# Altium PCB EVB_PHY_SR8201F_V1.0.0.PcbDoc (part 1 of 2)
Units mil, origin at the board's own origin, x right, y up, seen from the top; angles counter-clockwise.
Board outline 6000 x 4000 mil, 4 copper layers (Top, L2, L3, Bottom), stack 35.4 mil thick; 66 components, 60 nets, 233 pads, 178 vias.
Unrouted connection lines stored in the file: 129.
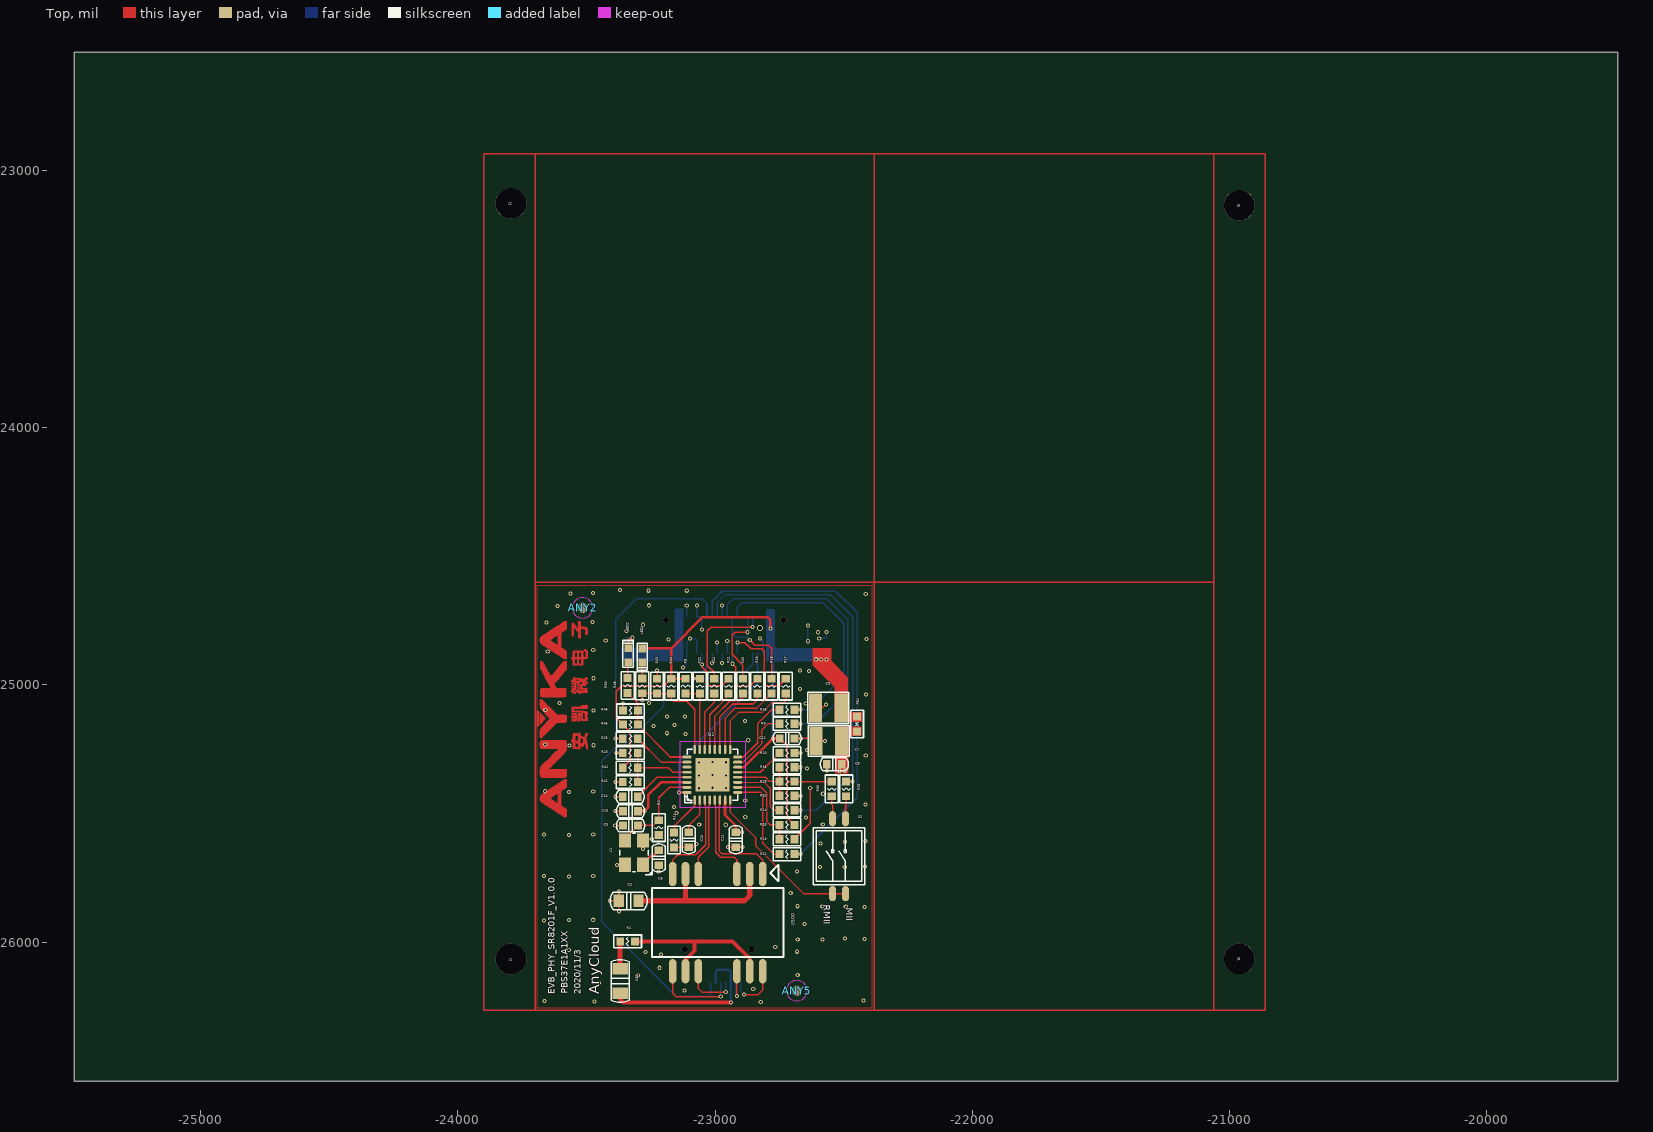
[diagram p0: Top view]
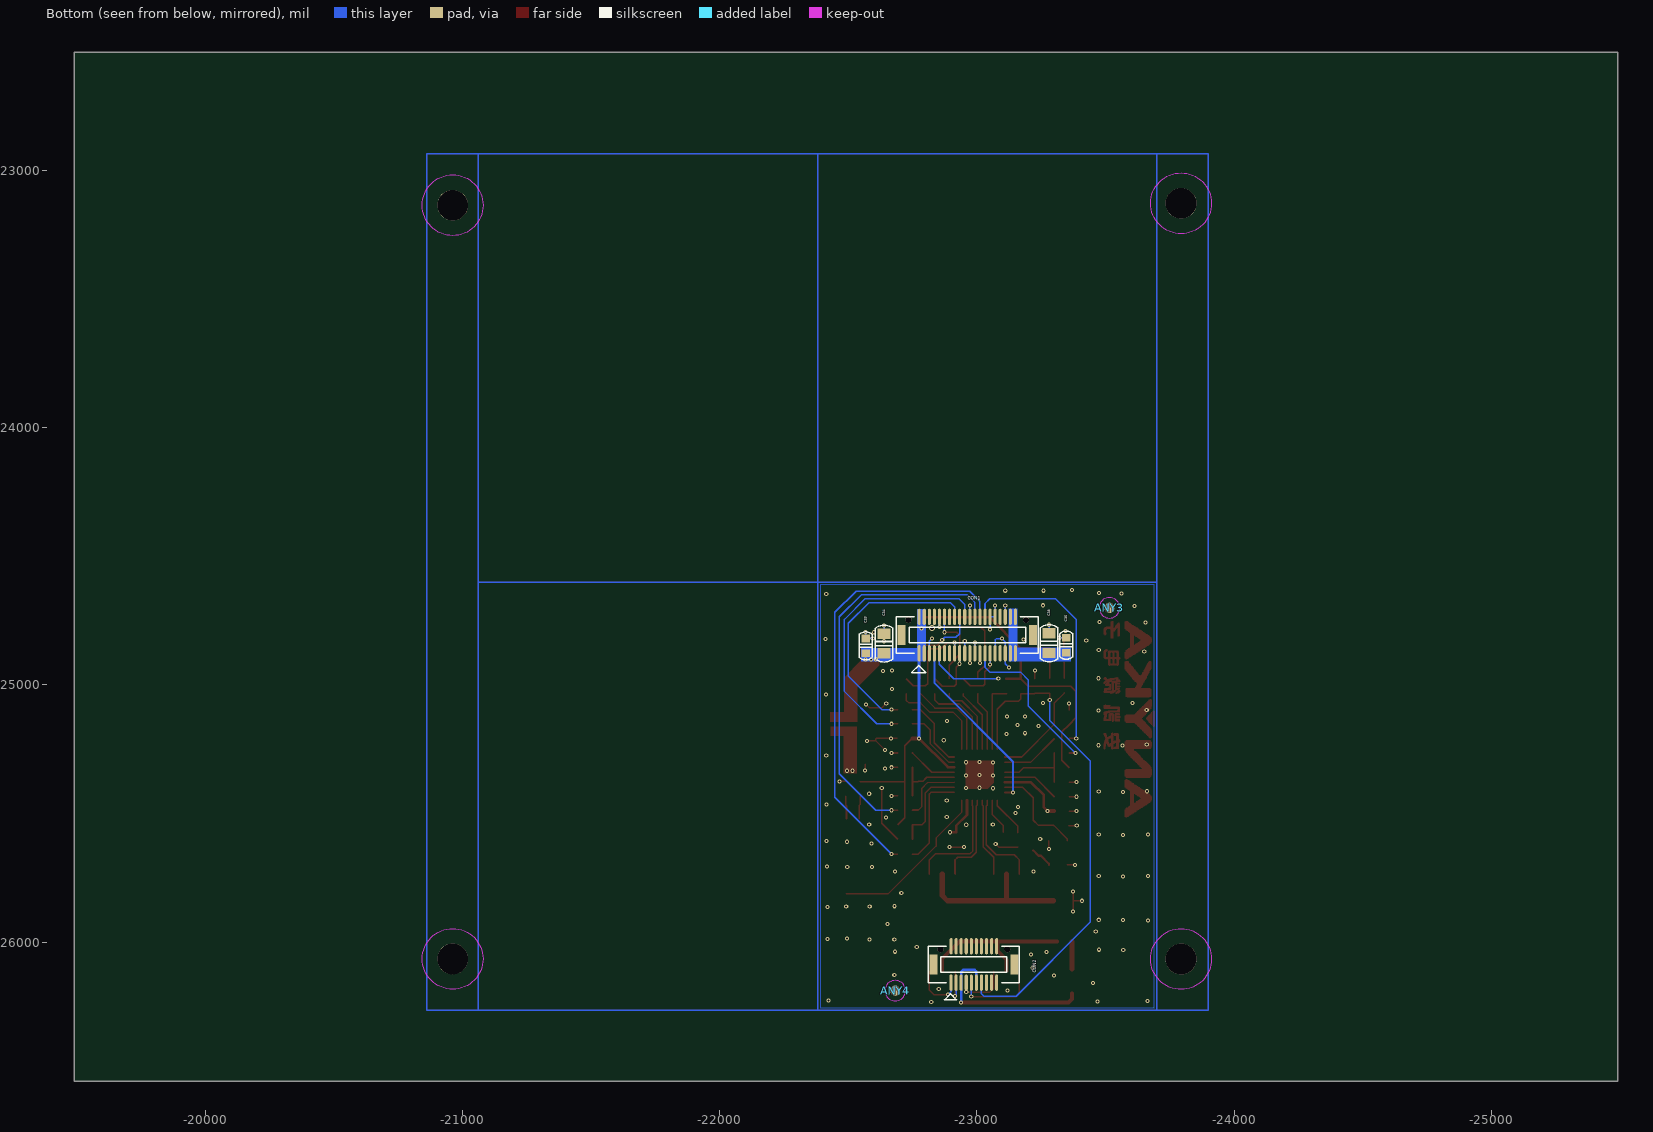
[diagram p1: Bottom view, seen from below]
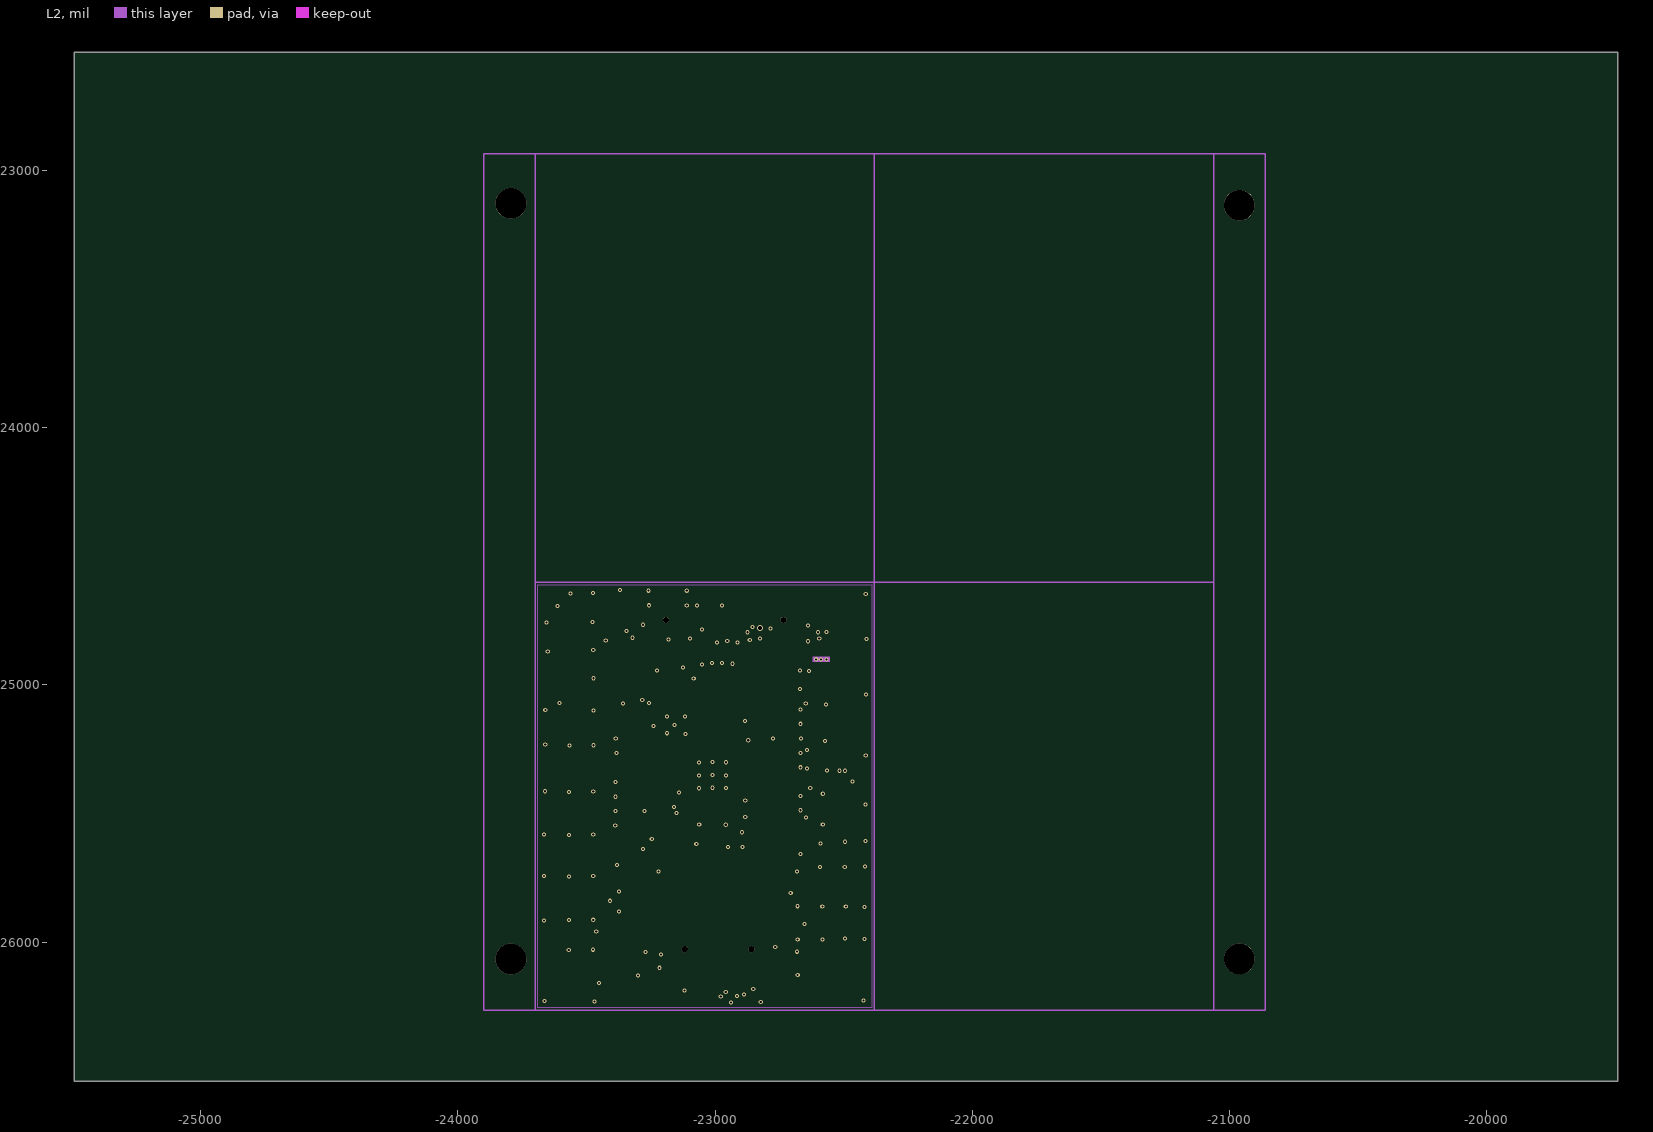
[diagram p2: L2]
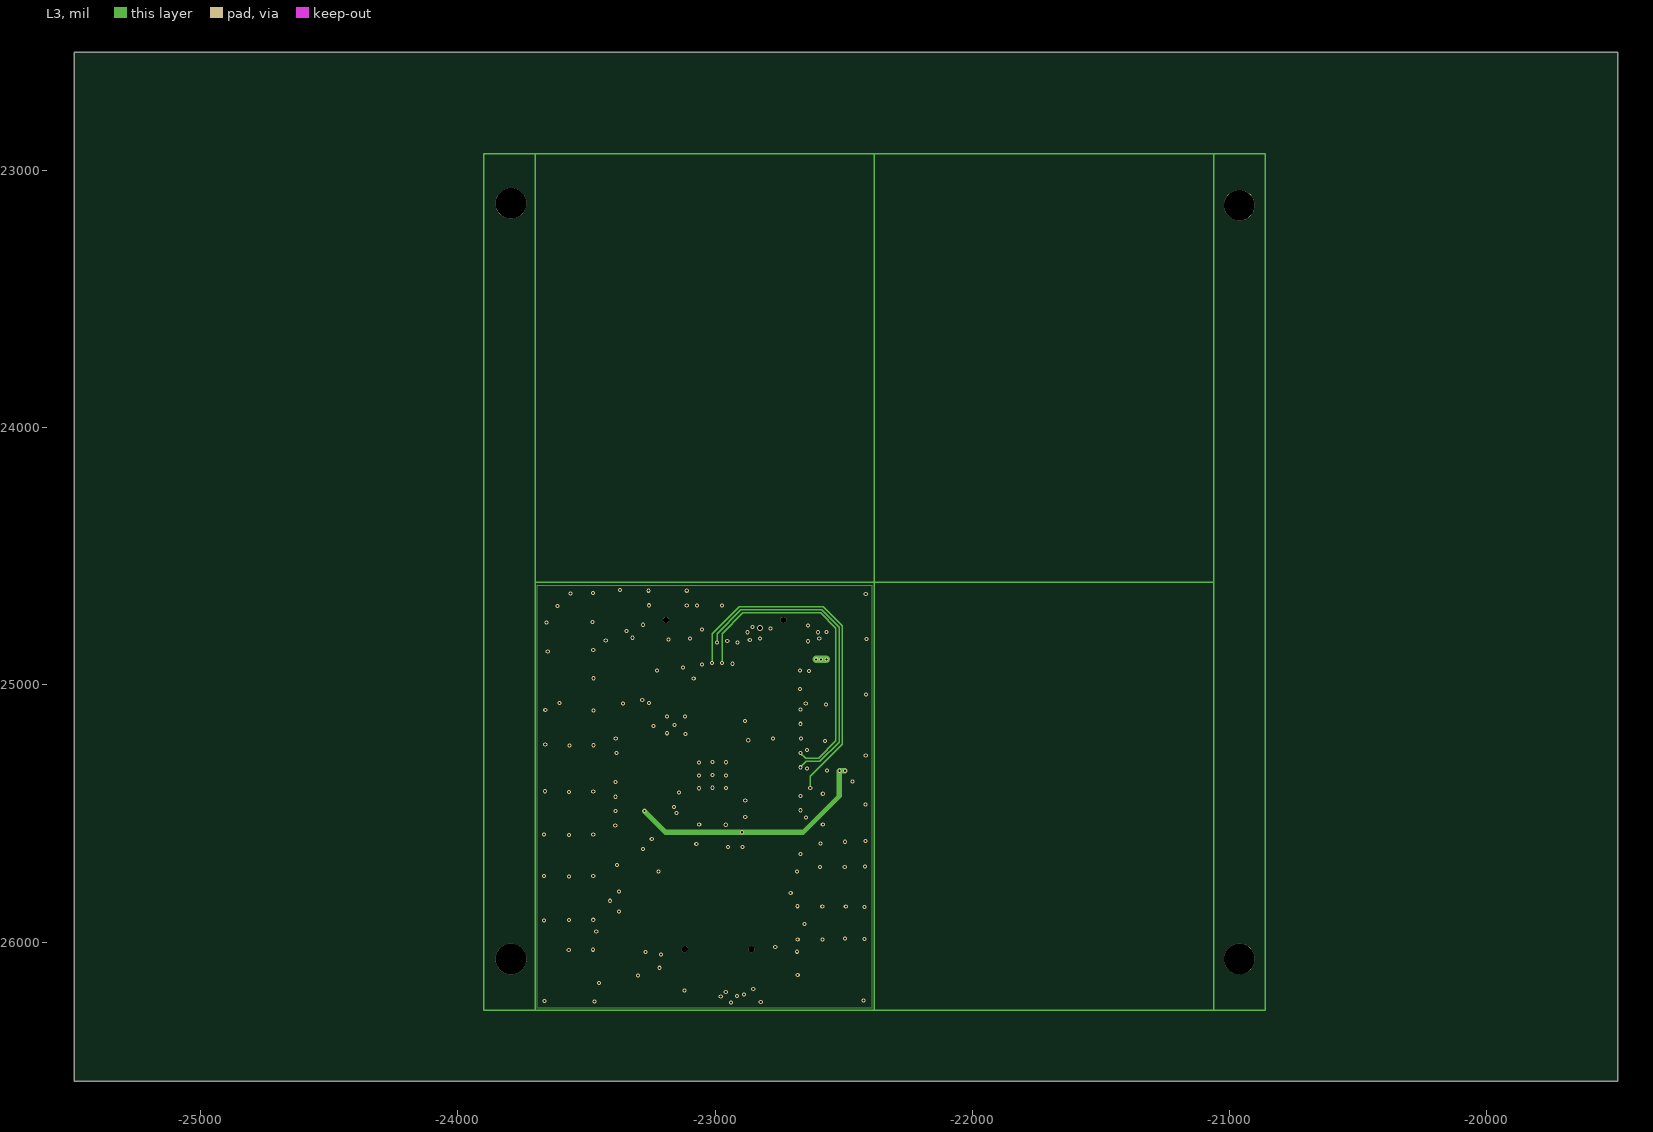
[diagram p3: L3]

## Layer stack, top to bottom
Solder Mask Top: solder mask 0.4, Solder Resist, Dk 3.5
Top: signal copper 1.35
Dielectric 1: dielectric 10, FR-4, Dk 4.3
L2: signal copper 1.35
Dielectric2: dielectric 10, FR-4, Dk 4.3
L3: signal copper 1.35
Dielectric3: dielectric 10, FR-4, Dk 4.3
Bottom: signal copper 1.35
Solder Mask Bottom: solder mask 0.4, Solder Resist, Dk 3.5

## Board outline
-25491,-26540.5 -19491,-26540.5 -19491,-22540.5 -25491,-22540.5

## Design rules (kind name [scope] priority, off if disabled: settings)
Clearance "Clearance - Default - DEFAULT- SMD" [IsVia vs IsSMTPin] p1: gap=6 ignorepadtopadclearanceinfootprint=FALSE
Clearance "Clearance - Default - DEFAULT - Via" [IsVia vs IsVia] p2: gap=6 ignorepadtopadclearanceinfootprint=FALSE
Clearance "Clearance - Default - DEFAULT - Net" [All] p3: gap=6 ignorepadtopadclearanceinfootprint=FALSE except(0: Arc-Hole Track-Hole SMDPad-Hole THPad-Hole Via-Hole Fill-Hole Poly-Hole Region-Hole Text-Hole; 10: Text-Text)
ComponentClearance "ComponentClearance - Default - DEFAULT" [All] p1: gap=6 collisioncheckmode=3 verticalgap=10 showdistances=FALSE
FanoutControl Fanout_Small [(CompPinCount < 5)] p3: bgadir=Out bgaviamode=Centered fanoutstyle=Auto fanoutdirection=OutThenIn viagrid=1 // Fanout_Small (Default Rule)
FanoutControl Fanout_SOIC [IsSOIC] p4: bgadir=Out bgaviamode=Centered fanoutstyle=Auto fanoutdirection=Alternating viagrid=1 // Fanout_SOIC (Default Rule)
HoleToHoleClearance "HoleToHoleClearance - Default - DEFAULT" [All] p1: gap=6 allowstackedmicrovias=TRUE
Length "Default Length" [All] p1: maxlimit=50000 minlimit=0
MaxMinImpedance "Default Impedance" [All] p1: minimum=50.00 maximum=150.0
ParallelSegment "Default Parallel Segment Adjasent" [All] p1: limit=1000 gap=200
ParallelSegment "Default Parallel Segment Same Layer" [All] p2: limit=1000 gap=200
PlaneConnect "Default PlaneConnect" [All] p1: planeconnectstyle=Direct reliefexpansion=20 reliefentries=4 reliefconductorwidth=8 reliefairgap=10
PolygonConnect "PolygonConnect - Default SMT" [IsSMTPin] p1: connectstyle=Direct reliefconductorwidth=8 reliefentries=4 polygonreliefangle="45 Angle" airgapwidth=10
PolygonConnect "PolygonConnect - Default Pad" [All] p2: connectstyle=Direct reliefconductorwidth=8 reliefentries=4 polygonreliefangle="45 Angle" airgapwidth=10
RoutingLayers "RoutingLayers - Default - DEFAULT" [All] p1: top layer_v5=TRUE mid layer 1_v5=TRUE mid layer 2_v5=TRUE bottom layer_v5=TRUE
RoutingPriority "RoutingPriority - Default - DEFAULT" [All] p1: routingpriority=3
RoutingTopology "Default Routing Topology" [All] p1: topology=Shortest
RoutingVias "RoutingVias - Default - DEFAULT" [All] p1: holewidth=8 width=16 viastyle="Through Hole" minholewidth=8 minwidth=16 maxholewidth=8 maxwidth=16
SMDToCorner "SMDToCorner - Default - DEFAULT" [All] p1: distance=60000
SolderMaskExpansion [All] p1: expansion=4 istentingtop=FALSE
Width "Default Width" [All] p1: maxlimit=200 minlimit=5 preferedwidth=5
20 further rules are at their usual default settings.

## Components (designator, comment, footprint, x,y, rotation, side; value= is the part's Value field where it differs from the comment)
ANY2 "FIDU_40" FIDU_40 -23515,-24700 r0 top
ANY3 "FIDU_40" FIDU_40 -23515,-24700 r180 bottom
ANY4 "FIDU_40" FIDU_40 -22682.5,-26188.5 r180 bottom
ANY5 "FIDU_40" FIDU_40 -22682.5,-26188.5 r0 top
C2 "C0805" C0805 -23336,-25839 r180 top
C5 "C0603" C0603 -23328.5,-25546.5 r0 top
C6 "C0603" C0603 -23218.5,-25672 r90 top
C7 "C1210" C1210 -22557.5,-25217.5 r180 top
C8 "C0603" C0603 -22536.5,-25308 r0 top
C9 "C1210" C1210 -22559.5,-25089 r180 top
C10 "C0603" C0603 -23102.5,-25601.5 r90 top
C11 "C0603" C0603 -22919.5,-25601.5 r90 top
C12 "C0603" C0603 -22720,-25208 r180 top
C13 "C0603" C0603 -23329,-25490.5 r180 top
C14 "C0603" C0603 -23330,-25434.5 r180 top
C33 "C0603" C0603 -22567.5,-24848 r270 bottom
C34 "C0805" C0805 -22639,-24839 r270 bottom
C35 "C0603" C0603 -23347.5,-24845.5 r270 bottom
C38 "C0805" C0805 -23280.5,-24837.5 r270 bottom
C62 "C1206" C1206 -23369,-26151 r0 top
CON1 "CON20X2_0MM5_BTB_DF12" CON20X2_0MM5_BTB_DF12 -22962.5,-24806 r180 bottom
CON2 "CON10X2_0MM5_BTB_DF12" CON10X2_0MM5_BTB_DF12 -22988,-26086.5 r180 bottom
FB1 "FB0603" FB0603 -22448,-25152 r270 top
J1 "SCREWING_H_3MM" SCREWING_H_3MM -23793.5,-26065.5 r0 top
J2 "SCREWING_H_3MM" SCREWING_H_3MM -23793.5,-23127.5 r0 top
J5 "SCREWING_H_3MM" SCREWING_H_3MM -20962,-23135 r0 top
J6 "SCREWING_H_3MM" SCREWING_H_3MM -20962,-26065 r0 top
LED1 "LED0603" LED0603 -23283,-24885.5 r90 top
LED2 "LED0603" LED0603 -23338,-24884.5 r270 top
R1 "R0603" R0603 -23340,-25997 r0 top
R2 "R0603" R0603 -23218.5,-25554.5 r90 top
R8 "R0603" R0603 -23115,-25004.5 r270 top
R9 "R0603" R0603 -22720.5,-25151 r0 top
R10 "R0603" R0603 -22720.5,-25264.5 r0 top
R11 "R0603" R0603 -23159.5,-25602.5 r90 top
R12 "R0603" R0603 -22720.5,-25657.5 r0 top
R13 "R0603" R0603 -22720.5,-25600 r0 top
R14 "R0603" R0603 -22720.5,-25487 r0 top
R15 "R0603" R0603 -22720.5,-25320 r0 top
R16 "R0603" R0603 -22720.5,-25096 r0 top
R17 "R0603" R0603 -22725.5,-25004.5 r90 top
R18 "R0603" R0603 -22780.5,-25004.5 r90 top
R19 "R0603" R0603 -22835.5,-25004.5 r90 top
R20 "R0603" R0603 -22891.5,-25004.5 r90 top
R21 "R0603" R0603 -22947.5,-25004.5 r90 top
R22 "R0603" R0603 -23059,-25004.5 r90 top
R23 "R0603" R0603 -23330,-25264.5 r180 top
R24 "R0603" R0603 -23003.5,-25004.5 r90 top
R25 "R0603" R0603 -23329.5,-25209 r180 top
R29 "R0603" R0603 -22720.5,-25375.5 r0 top
R30 "R0603" R0603 -22546.5,-25404 r90 top
R31 "R0603" R0603 -22490.5,-25404 r90 top
R32 "R0603" R0603 -22720.5,-25431 r0 top
R33 "R0603" R0603 -22720.5,-25544 r0 top
R41 "R0603" R0603 -23330,-25321.5 r180 top
R42 "R0603" R0603 -23329.5,-25377.5 r180 top
R43 "R0603" R0603 -23225.5,-25004.5 r90 top
R44 "R0603" R0603 -23170,-25004.5 r90 top
R45 "R0603" R0603 -23329,-25154 r180 top
R46 "R0603" R0603 -23329,-25099 r180 top
R49 "R0603" R0603 -23283,-25003.5 r90 top
R50 "R0603" R0603 -23340,-25002 r90 top
S1 "SWITCH_DHM-02_1MM27_5MM6X8MM3" SWITCH_DHM-02_1MM27_5MM6X8MM3 -22518,-25665.5 r90 top
U1 "RTL8201F_QFN32_0MM5_5X5MM" RTL8201F_QFN32_0MM5_5X5MM -23010.5,-25349 r90 top
U500 "TRC1102NLE" TRC1102NLE -22990,-25924 r270 top
X1 "KSX23" KSX23 -23315,-25652 r90 top

## Footprints (in the part's own frame and the unit in brackets; to place one, negate y for a bottom-side part, rotate by r counter-clockwise, add the part's x,y. Pads: shape width x height; smd on the part's side, far side on the other; paste and mask are expansions set on the pad)
C0603 [mil]
  rect 30x32 smd: 1(-29,0) 2(29,0)
  silkscreen extent -55,-25 55,25
C0805 [mil]
  rect 40x50 smd: 1(-38,0) 2(38,0)
  silkscreen extent -72,-34 72,34
C1206 [mil]
  rect 60x45 smd: 1(0,47.5) 2(0,-47.5)
  silkscreen extent -35,-83 35,83
C1210 [mil]
  rect 51x110 smd: 1(-50,0) 2(50,0)
  silkscreen extent -80,-60 80,60
CON10X2_0MM5_BTB_DF12 [mm]
  oval 0.3x1.6 smd: 1(-2.25,-1.8) 2(-2.25,1.8) 3(-1.75,-1.8) 4(-1.75,1.8) 5(-1.25,-1.8) 6(-1.25,1.8) 7(-0.75,-1.8) 8(-0.75,1.8) 9(-0.25,-1.8) 10(-0.25,1.8) 11(0.25,-1.8) 12(0.25,1.8) 13(0.75,-1.8) 14(0.75,1.8) 15(1.25,-1.8) 16(1.25,1.8) 17(1.75,-1.8) 18(1.75,1.8) 19(2.25,-1.8) 20(2.25,1.8)
  rect 0.8x2 smd: 41(-4,0) 42(4,0)
  round 0.6 hole 0.6 unplated: 43(-3.3,1.5) 44(3.3,1.5)
  silkscreen extent -4.5,-3.5 4.5,1.8
CON20X2_0MM5_BTB_DF12 [mm]
  oval 0.3x1.6 smd: 1(-4.75,-1.8) 2(-4.75,1.8) 3(-4.25,-1.8) 4(-4.25,1.8) 5(-3.75,-1.8) 6(-3.75,1.8) 7(-3.25,-1.8) 8(-3.25,1.8) 9(-2.75,-1.8) 10(-2.75,1.8) 11(-2.25,-1.8) 12(-2.25,1.8) 13(-1.75,-1.8) 14(-1.75,1.8) 15(-1.25,-1.8) 16(-1.25,1.8) 17(-0.75,-1.8) 18(-0.75,1.8) 19(-0.25,-1.8) 20(-0.25,1.8) 21(0.25,-1.8) 22(0.25,1.8) 23(0.75,-1.8) 24(0.75,1.8) 25(1.25,-1.8) 26(1.25,1.8) 27(1.75,-1.8) 28(1.75,1.8) 29(2.25,-1.8) 30(2.25,1.8) 31(2.75,-1.8) 32(2.75,1.8) 33(3.25,-1.8) 34(3.25,1.8) 35(3.75,-1.8) 36(3.75,1.8) 37(4.25,-1.8) 38(4.25,1.8) 39(4.75,-1.8) 40(4.75,1.8)
  rect 0.8x2 smd: 41(-6.5,0) 42(6.5,0)
  round 0.6 hole 0.6 unplated: 43(-5.8,1.5) 44(5.8,1.5)
  silkscreen extent -7,-3.7 7,1.8
FB0603 [mil]
  rect 30x32 smd: 1(-29,0) 2(29,0)
  silkscreen extent -54,-25 54,25
FIDU_40 [mil]
  round 40 smd: 1(0,0)
  Top keep-out region: 40,0 36.96,15.31 28.28,28.28 15.31,36.96 0,40 0,40 -15.31,36.96 -28.28,28.28 -36.96,15.31 -40,0 -40,0 -36.96,-15.31 -28.28,-28.28 -15.31,-36.96 0,-40 0,-40 15.31,-36.96 28.28,-28.28 36.96,-15.31 40,0
KSX23 [mil]
  rect 55.1x47.2 smd: 1(-47.24,-35.43) 2(47.24,-35.43) 3(47.24,35.43) 4(-47.24,35.43)
  silkscreen extent -87,-71 75,55
LED0603 [mil]
  rect 30x30 smd: A(27.5,0) K(-27.5,0)
  silkscreen extent -57,-20 48,20
R0603 [mil]
  rect 30x32 smd: 1(-29,0) 2(29,0)
  silkscreen extent -54,-25 54,25
RTL8201F_QFN32_0MM5_5X5MM [mm]
  oval 0.9x0.25 smd: 1(-2.5,1.75) 2(-2.5,1.25) 3(-2.5,0.75) 4(-2.5,0.25) 5(-2.5,-0.25) 6(-2.5,-0.75) 7(-2.5,-1.25) 8(-2.5,-1.75) 17(2.5,-1.75) 18(2.5,-1.25) 19(2.5,-0.75) 20(2.5,-0.25) 21(2.5,0.25) 22(2.5,0.75) 23(2.5,1.25) 24(2.5,1.75)
  oval 0.28x0.9 smd: 9(-1.75,-2.5) 10(-1.25,-2.5) 11(-0.75,-2.5) 12(-0.25,-2.5) 13(0.25,-2.5) 14(0.75,-2.5) 15(1.25,-2.5) 16(1.75,-2.5) 25(1.75,2.5) 26(1.25,2.5) 27(0.75,2.5) 28(0.25,2.5) 29(-0.25,2.5) 30(-0.75,2.5) 31(-1.25,2.5) 32(-1.75,2.5)
  rect 3.35x3.35 smd: 33(0,0)
  Top region: -1.375,0.784 -0.784,1.375 1.375,1.375 1.375,-1.375 -1.375,-1.375 -1.375,0.784
  silkscreen extent -2.75,-2.5 2.5,2.75
SCREWING_H_3MM [mil]
  round 120 hole 120 unplated: 1(0,0)
  Bottom keep-out region: 118.11,0 109.12,45.2 83.52,83.52 45.2,109.12 0,118.11 0,118.11 -45.2,109.12 -83.52,83.52 -109.12,45.2 -118.11,0 -118.11,0 -109.12,-45.2 -83.52,-83.52 -45.2,-109.12 0,-118.11 0,-118.11 45.2,-109.12 83.52,-83.52 109.12,-45.2 118.11,0
SWITCH_DHM-02_1MM27_5MM6X8MM3 [mm]
  oval 1.5x0.7 smd: 1(-3.7,0.635) 2(3.7,0.635) 3(-3.7,-0.635) 4(3.7,-0.635)
  silkscreen extent -2.8,-2.56 2.8,2.56
TRC1102NLE [mm]
  oval 2.4x0.75 smd: 1(-4.8,4.445) 2(-4.8,3.175) 3(-4.8,1.905) 6(-4.8,-1.905) 7(-4.8,-3.175) 8(-4.8,-4.445) 9(4.8,-4.445) 10(4.8,-3.175) 11(4.8,-1.905) 14(4.8,1.905) 15(4.8,3.175) 16(4.8,4.445)
  silkscreen extent -5.7,-6.5 3.4,6.5

## Via types
v1: diameter 16, hole 8, Top to Bottom, 177 vias
v2: diameter 24, hole 16, Top to Bottom, 1 vias

## Nets (pads, with @x,y where several pads share a name; then routed paths per layer and width w, separated by ;. In a path a pad name is that pad's centre, name@x,y a point inside that pad or via, vN(x,y) a via of type N, cw(c..) or ccw(c..) an arc to the next point about the centre after c; other vN are vias at no path point)
3V3: C9.1 C12.2 C33.2 C34.2 CON1.1 CON1.2 CON1.3 CON1.4 FB1.1 LED1.A R8.1 R29.2 R30.2 R33.2 R41.2 R44.2 R45.2 U1.14 | length 2964
  Top w5: R41.2@-23359,-25321.5 -23329.5,-25292 -23329.5,-25182.5 R45.2@-23358,-25154 -23385,-25127 -23385,-25025 -23364.5,-25004.5 -23199,-25004.5 R44.2@-23170,-24975.5 ; C12.2@-22749,-25208 -22720,-25237 -22720,-25375.5 ; R33.2@-22691.5,-25544 -22720,-25515.5 -22720,-25375.5 ; R30.2@-22546.5,-25375 -22546.5,-25375.5 R29.2@-22691.5,-25375.5 -22720,-25375.5
  Top w6: FB1.1@-22448,-25123 FB1.1@-22433,-25138
  Top w10: LED1.A@-23283,-24858 -23170,-24858 ; R8.1@-23115,-24975.5 R44.2@-23170,-24975.5 -23170,-24858 ; U1.14@-22912.07,-25319.47 -22886.96,-25319.47 v1(-22775.49,-25208) ; v1(-22785,-24780) -22785,-24746.5 -22795.5,-24736 -23048,-24736 -23170,-24858
  Top w15: v1(-22775.49,-25208) C12.2@-22749,-25208
  Top w20: C9.1@-22509.5,-25089 -22509,-25089.5 -22509,-25123 FB1.1@-22448,-25123
  Top w30: v1(-22587.88,-24900.51) -22587.88,-24923.62 -22509.5,-25002 C9.1@-22509.5,-25089
  L3 w30: v1(-22606.85,-24900.17) -22606.5,-24900.51 v1(-22587.88,-24900.51) ; v1(-22587.88,-24900.51) v1(-22567.5,-24900.5)
  Bottom w6: CON1.3@-22795.18,-24876.87 CON1.1@-22775.49,-24876.87 CON1.2@-22775.49,-24735.13 CON1.4@-22795.18,-24735.13 ; C34.2@-22639.13,-24876.87 C34.2@-22639,-24877 ; C33.2@-22573,-24877 C33.2@-22567.5,-24877
  Bottom w12: v1(-22775.49,-25208) CON1.1@-22775.49,-24876.87
25M_PHY: C6.2 CON1.7 U1.32 X1.1 | length 785.7
  Top w8: X1.1@-23279.57,-25699.24 -23279.57,-25694.57 -23249,-25664 -23239.5,-25664 C6.2@-23218.5,-25643 ; v1(-23140,-25417.9) U1.32@-23108.93,-25417.9
  Bottom w8: v1(-23140,-25417.9) -23140,-25297.5 -22834.55,-24992.05 CON1.7@-22834.55,-24876.87
$$$2269: LED1.K R49.2 | length 61.5
  Top w6: R49.2@-23283,-24974.5 LED1.K@-23283,-24913
$$$6636: R1.2 U500.10 U500.15 | length 653.2
  Top w15: R1.2@-23311,-25997 -23080,-25997 ; U500.10@-23115,-26112.98 -23115,-26068 -23080,-26033 -23080,-25997 ; U500.15@-22865,-26112.98 -22865,-26064 -22932,-25997 -23080,-25997
$$$7002: C2.1 U500.2 U500.7 | length 629.2
  Top w20: C2.1@-23298,-25839 -23115,-25839 ; U500.7@-23115,-25735.02 -23115,-25839 ; U500.2@-22865,-25735.02 -22865,-25819 -22885,-25839 -23115,-25839
$$$8409: R31.1 S1.4 | length 88.1
  Top w6: S1.4@-22493,-25519.83 -22493,-25469.5 -22490,-25466.5 -22490,-25443.5 R31.1@-22490.5,-25433
$$$8411: R30.1 S1.2 | length 88.1
  Top w6: R30.1@-22546.5,-25433 -22546,-25443.5 -22546,-25464 -22543,-25467 S1.2@-22543,-25519.83
$$$10124: R12.1 U1.9 | length 373.1
  Top w6: U1.9@-22912.07,-25417.9 -22821.1,-25417.9 -22814.5,-25424.5 -22814.5,-25614 -22771.5,-25657 -22771.5,-25657.5 R12.1@-22749.5,-25657.5
$$$10150: R14.1 U1.11 | length 248.7
  Top w6: U1.11@-22912.07,-25378.53 -22808.05,-25379.43 -22786,-25401.52 -22786,-25472.5 -22772.5,-25486 -22750.5,-25486 R14.1@-22749.5,-25487
$$$10327: R20.1 U1.20 | length 283.8
  Top w6: U1.20@-23000.66,-25250.57 -23000.66,-25121 -22941.16,-25061.5 -22904.5,-25061.5 -22892,-25049 -22892,-25034 R20.1@-22891.5,-25033.5
$$$10328: R19.1 U1.19 | length 323.9
  Top w6: U1.19@-22980.97,-25250.57 -22980.97,-25123.5 -22931.47,-25074 -22852,-25074 -22835.5,-25057.5 R19.1@-22835.5,-25033.5
$$$10329: R18.1 U1.18 | length 341.3
  Top w6: U1.18@-22961.29,-25250.57 -22961.29,-25130 -22921.29,-25090 -22837,-25090 R18.1@-22780.5,-25033.5
$$$10330: R17.1 U1.17 | length 386.3
  Top w6: U1.17@-22941.6,-25250.57 -22941.6,-25140 -22908.5,-25106.9 -22818,-25106.9 -22781.1,-25070 -22735.5,-25070 -22725.5,-25060 R17.1@-22725.5,-25033.5
$$$10331: R16.1 U1.16 | length 282.8
  Top w6: U1.16@-22912.07,-25280.1 -22890.1,-25280.1 -22834.5,-25224.5 -22834.5,-25149.5 -22781,-25096 R16.1@-22749.5,-25096
$$$10551: LED2.A R50.2 | length 61.8
  Top w6: R50.2@-23340,-24973 -23340,-24914 LED2.A@-23338,-24912
$$$10778: R11.2 U1.1 | length 159.3
  Top w6: R11.2@-23159.5,-25573.5 -23159.5,-25549.5 -23079.4,-25469.4 U1.1@-23079.4,-25447.43
$$$10835: C10.2 U1.2 | length 142.8
  Top w6: C10.2@-23102.5,-25572.5 -23102.5,-25546.29 -23059.71,-25503.5 U1.2@-23059.71,-25447.43
$$$10877: R21.1 U1.21 | length 247.2
  Top w6: U1.21@-23020.34,-25250.57 -23020.34,-25116 -22947.5,-25043.16 R21.1@-22947.5,-25033.5
$$$10878: R24.1 U1.22 | length 232.2
  Top w6: U1.22@-23040.03,-25250.57 -23040.03,-25105.5 -23004,-25069.47 -23004,-25034 R24.1@-23003.5,-25033.5
$$$10879: R8.2 R22.1 U1.23 | length 273.4
  Top w6: R8.2@-23115,-25033.5 R22.1@-23059,-25033.5 -23059.71,-25034.21 U1.23@-23059.71,-25250.57
$$$10880: R25.1 U1.26 | length 229.2
  Top w6: R25.1@-23300.5,-25209 -23209.71,-25299.79 U1.26@-23108.93,-25299.79
$$$12144: R9.1 U1.15 | length 255.5
  Top w6: U1.15@-22912.07,-25299.79 -22889.79,-25299.79 -22818,-25228 -22818,-25174.5 -22794.5,-25151 R9.1@-22749.5,-25151
$$$12240: R10.1 U1.13 | length 193.5
  Top w6: U1.13@-22912.07,-25339.16 -22824.16,-25339.16 R10.1@-22749.5,-25264.5
$$$12609: C14.1 U1.29 | length 223.4
  Top w6: C14.1@-23301,-25434.5 -23225.34,-25358.84 U1.29@-23108.93,-25358.84
$$$19434: C62.1 R1.1 | length 106.5
  Top w20: C62.1@-23369,-26103.5 R1.1@-23369,-25997
AVDD33: C7.1 C8.2 C11.2 C13.1 FB1.2 U1.7 U1.30 | length 1587.7
  Top w10: v1(-23275,-25490.5) -23260,-25475.5 -23260,-25428.53 -23210,-25378.53 U1.30@-23108.93,-25378.53 ; U1.7@-22961.29,-25447.43 -22961.29,-25505.5 -22919.5,-25547.29 C11.2@-22919.5,-25572.5 v1(-22896,-25572.5)
  Top w15: C13.1@-23300,-25490.5 v1(-23275,-25490.5)
  Top w20: C7.1@-22507.5,-25217.5 -22507.5,-25181 FB1.2@-22448,-25181
  Top w30: C8.2@-22507.5,-25308 C7.1@-22507.5,-25217.5
  L3 w20: v1(-23275,-25490.5) -23193,-25572.5 v1(-22896,-25572.5) -22657.5,-25572.5 -22517.25,-25432.25 -22517.25,-25334.25 v1(-22516.5,-25333.5) v1(-22495,-25333.5)
ETH_RX+: CON2.7 U500.11 | length 216.9
  Top w6: U500.11@-23065,-26112.98 -23065,-26180.37 -23050.29,-26194 v1(-22958.5,-26194)
  Bottom w6: v1@-22958.47,-26195 CON2.7@-22958.47,-26157.37
ETH_RX-: CON2.9 U500.9 | length 331.7
  Top w6: U500.9@-23165,-26112.98 -23165,-26196.5 -23152.5,-26211.5 v1(-22978,-26211.5)
  Bottom w6: CON2.9@-22978.16,-26157.37 -22978.16,-26211.34 v1(-22978,-26211.5)
ETH_TX+: CON2.1 U500.16 | length 204.1
  Top w6: v1(-22887.5,-26203.5) -22832.5,-26203.5 -22815,-26186 U500.16@-22815,-26112.98
  Bottom w6: CON2.1@-22899.42,-26157.37 -22899.42,-26192 -22887.92,-26203.5 v1(-22887.5,-26203.5)
ETH_TX-: CON2.3 U500.14 | length 148.7
  Top w6: v1(-22915,-26208.5) U500.14@-22915,-26112.98
  Bottom w6: CON2.3@-22919.1,-26157.37 -22919.1,-26205 -22918.5,-26205 v1(-22915,-26208.5)
GND: C2.2 C5.1 C6.1 C7.2 C8.1 C9.2 C10.1 C11.1 C12.1 C13.2 C14.2 C33.1 C34.1 C35.1 C38.1 CON1.5 CON1.6 CON1.8 CON1.19 CON1.22 CON1.30 CON1.31 CON1.32 CON1.35 CON1.36 LED2.K R2.1 R11.1 R31.2 R32.2 R42.2 R43.2 R46.2 U1.33 X1.2 X1.4 | length 1680.3
  Top w5: R46.2@-23358,-25099 v1(-23358,-25072.5) ; v1(-22949,-25630.5) C11.1@-22919.5,-25630.5 ; C12.1@-22691,-25208 v1(-22666,-25208)
  Top w6: v1(-23408,-25839) C2.2@-23374,-25839 ; v1(-23388,-25546.5) C5.1@-23357.5,-25546.5 ; v1(-23387.5,-25490.5) C13.2@-23358,-25490.5 ; v1(-23387,-25434.5) C14.2@-23359,-25434.5 ; v1(-23387,-25377.5) R42.2@-23358.5,-25377.5 ; v1(-23381,-25699.24) X1.4@-23350.43,-25699.24 ; v1(-23374,-25881) C2.2@-23374,-25839 ; v1(-23374,-25803) C2.2@-23374,-25839 ; LED2.K@-23338,-24857 -23338,-24826.5 -23328,-24816.5 v1(-23321,-24816.5) ; X1.2@-23279.57,-25604.76 -23279.5,-25604.76 v1(-23279.5,-25638) ; R43.2@-23225.5,-24975.5 v1(-23225.5,-24944.5) ; R11.1@-23159.5,-25631.5 -23158.5,-25630.5 C10.1@-23102.5,-25630.5 -23085.5,-25630.5 v1(-23073,-25618) ; v1(-23010.5,-25399.5) U1.33@-23010.5,-25349 v1(-23010.5,-25299) ; C11.1@-22919.5,-25630.5 v1(-22893,-25630.5) ; R32.2@-22691.5,-25431 v1(-22667.5,-25431) ; v1(-22666,-25208) -22608,-25208 -22607.5,-25208.5 C7.2@-22607.5,-25217.5 ; v1(-22647.5,-25072.5) -22631,-25089 C9.2@-22609.5,-25089 -22582,-25089 v1(-22569,-25076) ; v1(-22643,-25253) C7.2@-22607.5,-25217.5 ; v1(-22573,-25217.5) C7.2@-22607.5,-25217.5 ; v1(-22565.5,-25333) C8.1@-22565.5,-25308 ; R31.2@-22490.5,-25375 v1(-22466,-25375)
  Bottom w5: v1(-23051.08,-24785) CON1.30@-23051.08,-24735.13 ; v1(-22639,-24830) C34.1@-22639,-24801 ; v1(-22595,-24819) C33.1@-22567.5,-24819
  Bottom w6: C35.1@-23347.5,-24816.5 v1(-23321,-24816.5) ; C38.1@-23280.5,-24799.5 v1(-23280.5,-24766) ; v1(-23124.5,-24931.86) -23110.14,-24917.5 CON1.35@-23110.14,-24876.87 -23110.14,-24832.64 v1(-23097.5,-24820) -23076.64,-24820 -23070.77,-24824.23 CON1.31@-23070.77,-24876.87 ; CON1.36@-23110.14,-24735.13 -23110,-24735.13 v1(-23110,-24691) ; v1(-23070.77,-24691) CON1.32@-23070.77,-24735.13 CON1.30@-23051.08,-24735.13 ; v1(-22972.5,-24691) -22972.5,-24735.13 CON1.22@-22972.34,-24735.13 ; CON1.19@-22952.66,-24876.87 v1(-22952.66,-24829) ; v1(-22825,-24819.86) -22814.86,-24830 CON1.5@-22814.86,-24876.87 ; C34.1@-22639,-24801 v1(-22639,-24769.5) ; C33.1@-22567.5,-24819 v1(-22567.5,-24793.5)
  other v1: -22822.5,-26233 -23469.33,-26229.93 -23663.18,-26228.55 -22422.58,-26227.16 -23118.97,-26187.3 -22851.59,-26182.25 -23451.5,-26158 -23300,-26130 -22678.73,-26127.47 -23216.76,-26099.47 -23209.82,-26048.17 -23270,-26037.5 -22682,-26037 -23568.79,-26030.64 -23474.87,-26029.17 -22766,-26019 -22678.73,-25989.01 -22581.81,-25989.01 -22419.81,-25987.63 -22494.58,-25986.25 -23462,-25959 -22652,-25929 -23664.33,-25915.71 -23567.4,-25914.33 -23473.49,-25912.86 -22418.43,-25862.82 -22583.2,-25861.44 -22491.81,-25861.44 -22680.12,-25860.05 -22706,-25809 -23567.4,-25744.03 -23665.71,-25742.64 -23473.49,-25742.56 -22681.5,-25725.75 -23220,-25725 -22591.5,-25707.75 -22495.97,-25707.75 -22417.05,-25706.36 -22590.12,-25616.37 -22494.58,-25609.44 -22415.66,-25606.67 -23246,-25599 -23567.4,-25583.41 -23473.49,-25581.95 -23664.33,-25580.64 -22958.48,-25543.47 -23061.67,-25541.71 -22581.25,-25541.92 -22646.51,-25515.46 -22882.64,-25513.49 -23149.86,-25497.61 -23160,-25475 -22415.66,-25464.06 -22882.64,-25449.11 -22581.25,-25422.86 -23567.4,-25415.88 -23473.49,-25414.41 -23661.56,-25413.11 -23062.77,-25401.43 -22957.48,-25400.93 -23062.77,-25351.74 -22957.48,-25351.24 -23010.5,-25349.81 -22642.98,-25324.09 -23062.77,-25300.93 -22957.48,-25300.43 -22414.28,-25274.37 -23566.02,-25235.88 -23472.1,-25234.41 -23660.17,-25231.73 -22871,-25215 -23115,-25190 -23187.5,-25187.5 -23240,-25160 -23157.5,-25155 -22883.12,-25140.4 -23187.5,-25122.5 -23117.5,-25122.5 -23660,-25098 -23471.92,-25098.53 -23605,-25070 -23257.5,-25070 -22412.89,-25037.61 -22669.27,-25015.33 -23472.5,-24974 -22635,-24945 -22669.27,-24943.33 -23650.5,-24869.5 -23473.49,-24864.73 -23425,-24827.5 -23180.77,-24823.75 -22411.51,-24821.81 -22600,-24795 -23345,-24790 -23654.87,-24756.73 -23476.26,-24755.35 -23612.5,-24692.5 -23257.49,-24690.27 -22414.28,-24645.96 -23562.1,-24644.58 -23474.87,-24643.19 -23258.38,-24633.55 -23110.08,-24633.55 -23369.6,-24631.3
  other v2: -22825,-24778
GND_EARTH: C62.2 CON2.5 CON2.11 | length 684.9
  Top w15: C62.2@-23369,-26198.5 -23369,-26220.5 -23355.5,-26234 v1(-22938.79,-26234)
  Bottom w10: CON2.11@-22997.84,-26157.37 -22997.84,-26114.5 -22990.84,-26107.5 -22946,-26107.5 -22939,-26114.5 -22939,-26157.15 CON2.5@-22938.79,-26157.37 v1(-22938.79,-26234)
LED0_NL: CON2.13 R43.1 R44.1 R49.1 U1.24 | length 1942.6
  Top w6: v1(-23283,-25059) R49.1@-23283,-25032.5 -23226.5,-25032.5 R43.1@-23225.5,-25033.5 R44.1@-23170,-25033.5 -23170.5,-25034 -23170.5,-25055.9 -23169.6,-25055.9 -23162,-25063.5 -23110.4,-25063.5 -23079.4,-25094.5 U1.24@-23079.4,-25250.57
  Bottom w6: v1(-23283,-25059) -23283,-25138 -23440,-25295 -23440,-25922.5 -23152.5,-26210 -23027.53,-26210 -23017.53,-26200 CON2.13@-23017.53,-26157.37
LED1_NL: R45.1 R46.1 R50.1 U1.25 | length 382.9
  Top w6: R50.1@-23340,-25031 -23300.08,-25070.92 -23300.08,-25079.92 -23300,-25080 R46.1@-23300,-25099 R45.1@-23300,-25154 -23173.9,-25280.1 U1.25@-23108.93,-25280.1
MAC_MDCLK: CON1.10 R24.2 | length 418.3
  Top w5: R24.2@-23003.5,-24975.5 -23003.5,-24951.5 -23030,-24925 -23030,-24790 -23015,-24775 v1(-22854.23,-24775)
  Bottom w5: v1(-22854.23,-24775) CON1.10@-22854.23,-24735.13
MAC_MDIO: CON1.9 R22.2 | length 318.4
  Top w5: v1(-23083,-24975.5) R22.2@-23059,-24975.5
  Bottom w5: v1(-23083,-24975.5) -22910.5,-24975.5 -22854.23,-24919.23 CON1.9@-22854.23,-24876.87
MAC_RSTN: CON1.29 R21.2 | length 225.1
  Top w5: v1(-23051.08,-24920) -23051.08,-24928.92 -23031,-24949 -23031,-24996.5 -23025,-25002.5 -22974.5,-25002.5 R21.2@-22947.5,-24975.5
  Bottom w5: v1(-23051.08,-24920) CON1.29@-23051.08,-24876.87
MAC_RXCLK: CON1.21 R10.2 | length 1288.9
  Top w6: R10.2@-22691.5,-25264.5 v1(-22668.5,-25264.5)
  L3 w5: v1(-22972.34,-24915) -22972.34,-24800 -22892.34,-24720 -22590,-24720 -22530,-24780 -22530,-25217.5 -22597.5,-25285 -22648,-25285 v1(-22668.5,-25264.5)
  Bottom w5: v1(-22972.34,-24915) CON1.21@-22972.34,-24876.87
MAC_RXD0: CON1.26 R12.2 | length 1730.1
  Top w5: R12.2@-22691.5,-25657.5 v1(-22668,-25657.5)
  Bottom w5: CON1.26@-23011.71,-24735.13 -23011.71,-24674.71 -22972,-24635 -22530,-24635 -22447.5,-24717.5 -22447.5,-25437 v1(-22668,-25657.5)
MAC_RXD1: CON1.25 R13.2 | length 1641.7
  Top w5: R13.2@-22691.5,-25600 -22630,-25538.5 v1(-22630,-25400)
  L3 w5: v1(-23011.71,-24915) -23011.71,-24800 -22906.71,-24695 -22580,-24695 -22505,-24770 -22505,-25230 -22630,-25355 v1(-22630,-25400)
  Bottom w5: v1(-23011.71,-24915) CON1.25@-23011.71,-24876.87
MAC_RXD2: CON1.24 R14.2 | length 1525.7
  Top w6: R14.2@-22691.5,-25487 v1(-22667.5,-25487)
  Bottom w6: CON1.24@-22992.03,-24735.13 -22992.03,-24679.03 -22963,-24650 -22550,-24650 -22465,-24735 -22465,-25345 -22607,-25487 v1(-22667.5,-25487)
MAC_RXD3: CON1.23 R15.2 | length 1279.6
  Top w6: R15.2@-22691.5,-25320 v1(-22668.5,-25320)
  L3 w5: v1(-22992.03,-24835) -22992.03,-24800 -22899.53,-24707.5 -22585,-24707.5 -22517.5,-24775 -22517.5,-25222.5 -22592.5,-25297.5 -22646,-25297.5 v1(-22668.5,-25320)
  Bottom w5: CON1.23@-22992.03,-24876.87 v1(-22992.03,-24835)
MAC_RXDV: CON1.28 R25.2 | length 938.9
  Top w6: v1(-23386,-25207.5) -23358.5,-25207.5 R25.2@-23358.5,-25209
  Bottom w6: v1(-23386,-25207.5) -23386,-25208 -23386,-24746 -23305,-24665 -23050,-24665 -23031.4,-24683.6 CON1.28@-23031.4,-24735.13
MAC_RXER: CON1.27 R23.2 | length 626.3
  Top w6: v1(-23382.5,-25264.5) R23.2@-23359,-25264.5
  Bottom w6: v1(-23382.5,-25264.5) -23199,-25081 -23199,-24980 -23169,-24950 -23050,-24950 -23031.4,-24931.4 CON1.27@-23031.4,-24876.87
MAC_TXCLK: CON1.20 R9.2 | length 1096.3
  Top w6: R9.2@-22691.5,-25151 v1(-22668,-25151)
  Bottom w6: CON1.20@-22952.66,-24735.13 -22952.66,-24687.66 -22930,-24665 -22565,-24665 -22485,-24745 -22485,-25025 -22611,-25151 v1(-22668,-25151)
MAC_TXD0: CON1.16 R16.2 | length 942.8
  Top w6: R16.2@-22691.5,-25096 v1(-22667.5,-25096)
  Bottom w6: CON1.16@-22913.29,-24735.13 -22913.29,-24696.29 -22897,-24680 -22580,-24680 -22500,-24760 -22500,-24965 -22631,-25096 v1(-22667.5,-25096)
MAC_TXD1: CON1.15 R17.2 | length 384.4
  Top w5: v1(-22913.29,-24835) -22885,-24835 -22860,-24860 -22817,-24860 -22808,-24869 -22808,-24995 -22800,-25003 -22753,-25003 R17.2@-22725.5,-24975.5
  Bottom w5: CON1.15@-22913.29,-24876.87 v1(-22913.29,-24835)
MAC_TXD2: CON1.18 R18.2 | length 358.9
  Top w5: v1(-22865,-24825) -22845,-24845 -22793.5,-24845 -22780.5,-24858 R18.2@-22780.5,-24975.5
  Bottom w5: CON1.18@-22932.97,-24735.13 -22932.97,-24800 -22917.97,-24815 -22875,-24815 v1(-22865,-24825)
MAC_TXD3: CON1.17 R19.2 | length 225.8
  Top w5: v1(-22932.97,-24917.5) -22920,-24930.47 -22920,-24997.5 -22912.5,-25005 -22865,-25005 R19.2@-22835.5,-24975.5
  Bottom w5: v1(-22932.97,-24917.5) CON1.17@-22932.97,-24876.87
MAC_TXEN: CON1.12 R20.2 | length 310.1
  Top w5: R20.2@-22891.5,-24975.5 -22891.5,-24922.5 -22932.5,-24881.5 -22932.5,-24805 -22922.5,-24795 v1(-22873.92,-24795)
  Bottom w5: v1(-22873.92,-24795) CON1.12@-22873.92,-24735.13
RX+_NL: U1.4 U500.6 | length 306.1
  Top w6: U500.6@-23065,-25735.02 -23065,-25670 -23023.84,-25628.84 -23023.84,-25470.5 -23020.34,-25467 U1.4@-23020.34,-25447.43
RX-_NL: U1.3 U500.8 | length 383.3
  Top w6: U500.8@-23165,-25735.02 -23165,-25680 -23145.5,-25660.5 -23075.5,-25660.5 -23036.53,-25621.53 -23036.53,-25471 -23040.03,-25467.5 U1.3@-23040.03,-25447.43
RXD1_NL: R13.1 R33.1 U1.10 | length 344.6
  Top w6: U1.10@-22912.07,-25398.21 -22820.29,-25398.21 -22799,-25419.5 -22799,-25531 -22786.5,-25543.5 -22786.5,-25544 R33.1@-22749.5,-25544 R13.1@-22749.5,-25600
RXD3_NL: R15.1 R29.1 R32.1 U1.12 | length 280.5
  Top w6: U1.12@-22912.07,-25358.84 -22805.09,-25358.84 -22788.93,-25375 -22771.5,-25375 -22771,-25375.5 R29.1@-22749.5,-25375.5 ; R32.1@-22749.5,-25431 R29.1@-22749.5,-25375.5 ; R15.1@-22749.5,-25320 R29.1@-22749.5,-25375.5
RXDV: S1.1 S1.3 U1.8 | length 644.9
  Top w6: U1.8@-22941.6,-25447.43 -22941.6,-25494 -22841,-25594.6 -22841,-25626 -22656,-25811 -22543.17,-25811 S1.1@-22543,-25811.17 S1.3@-22493,-25811.17
RXER_NL: R23.1 R41.1 R42.1 U1.28 | length 312.6
  Top w6: R23.1@-23301,-25264.5 R41.1@-23301,-25321.5 ; R42.1@-23300.5,-25377.5 -23300.5,-25322 R41.1@-23301,-25321.5 ; U1.28@-23108.93,-25339.16 -23163.34,-25339.16 -23181,-25321.5 R41.1@-23301,-25321.5
TX+_NL: U1.6 U500.1 | length 437.7
  Top w6: U1.6@-22980.97,-25447.43 -22980.97,-25468 -22984.47,-25471.5 -22984.47,-25645 -22972.97,-25656.5 -22839,-25656.5 -22815,-25680.5 U500.1@-22815,-25735.02
TX-_NL: U1.5 U500.3 | length 353.8
  Top w6: U1.5@-23000.66,-25447.43 -23000.66,-25467.5 -22997,-25471.16 -22997,-25650 -22977.5,-25669.5 -22925.5,-25669.5 -22914.66,-25680.34 -22914.66,-25734.68 U500.3@-22915,-25735.02
WIFI_3V3: C35.2 C38.2 CON1.37 CON1.38 CON1.39 CON1.40 | length 18.4
  Bottom w6: CON1.39@-23149.51,-24876.87 CON1.39@-23149.51,-24858.5
XO_NL: C5.2 R2.2 U1.31 X1.3 | length 382.4
  Top w6: X1.3@-23350.43,-25604.76 -23350.5,-25604.69 -23350.5,-25597.5 C5.2@-23299.5,-25546.5 -23299,-25546 -23239,-25546 R2.2@-23218.5,-25525.5 -23218.5,-25438.5 -23178.21,-25398.21 U1.31@-23108.93,-25398.21
pads on no net: ANY2.1 ANY3.1 ANY4.1 ANY5.1 CON1.11 CON1.13 CON1.14 CON1.33 CON1.34 CON1.41 CON1.42 CON1.43 CON1.44 CON2.2 CON2.4 CON2.6 CON2.8 CON2.10 CON2.12 CON2.14 CON2.15 CON2.16 CON2.17 CON2.18 CON2.19 CON2.20 CON2.41 CON2.42 CON2.43 CON2.44 J1.1 J2.1 J5.1 J6.1 U1.27